# Altium PCB ESP8266_IR_PZEM.PcbDoc
Units mm, origin at the board's own origin, x right, y up, seen from the top; angles counter-clockwise.
Board outline 62.56 x 60.78 mm, 2 copper layers (Top Layer, Bottom Layer); 8 components, 10 nets, 54 pads, 1 vias.
Unrouted connection lines stored in the file: 4.
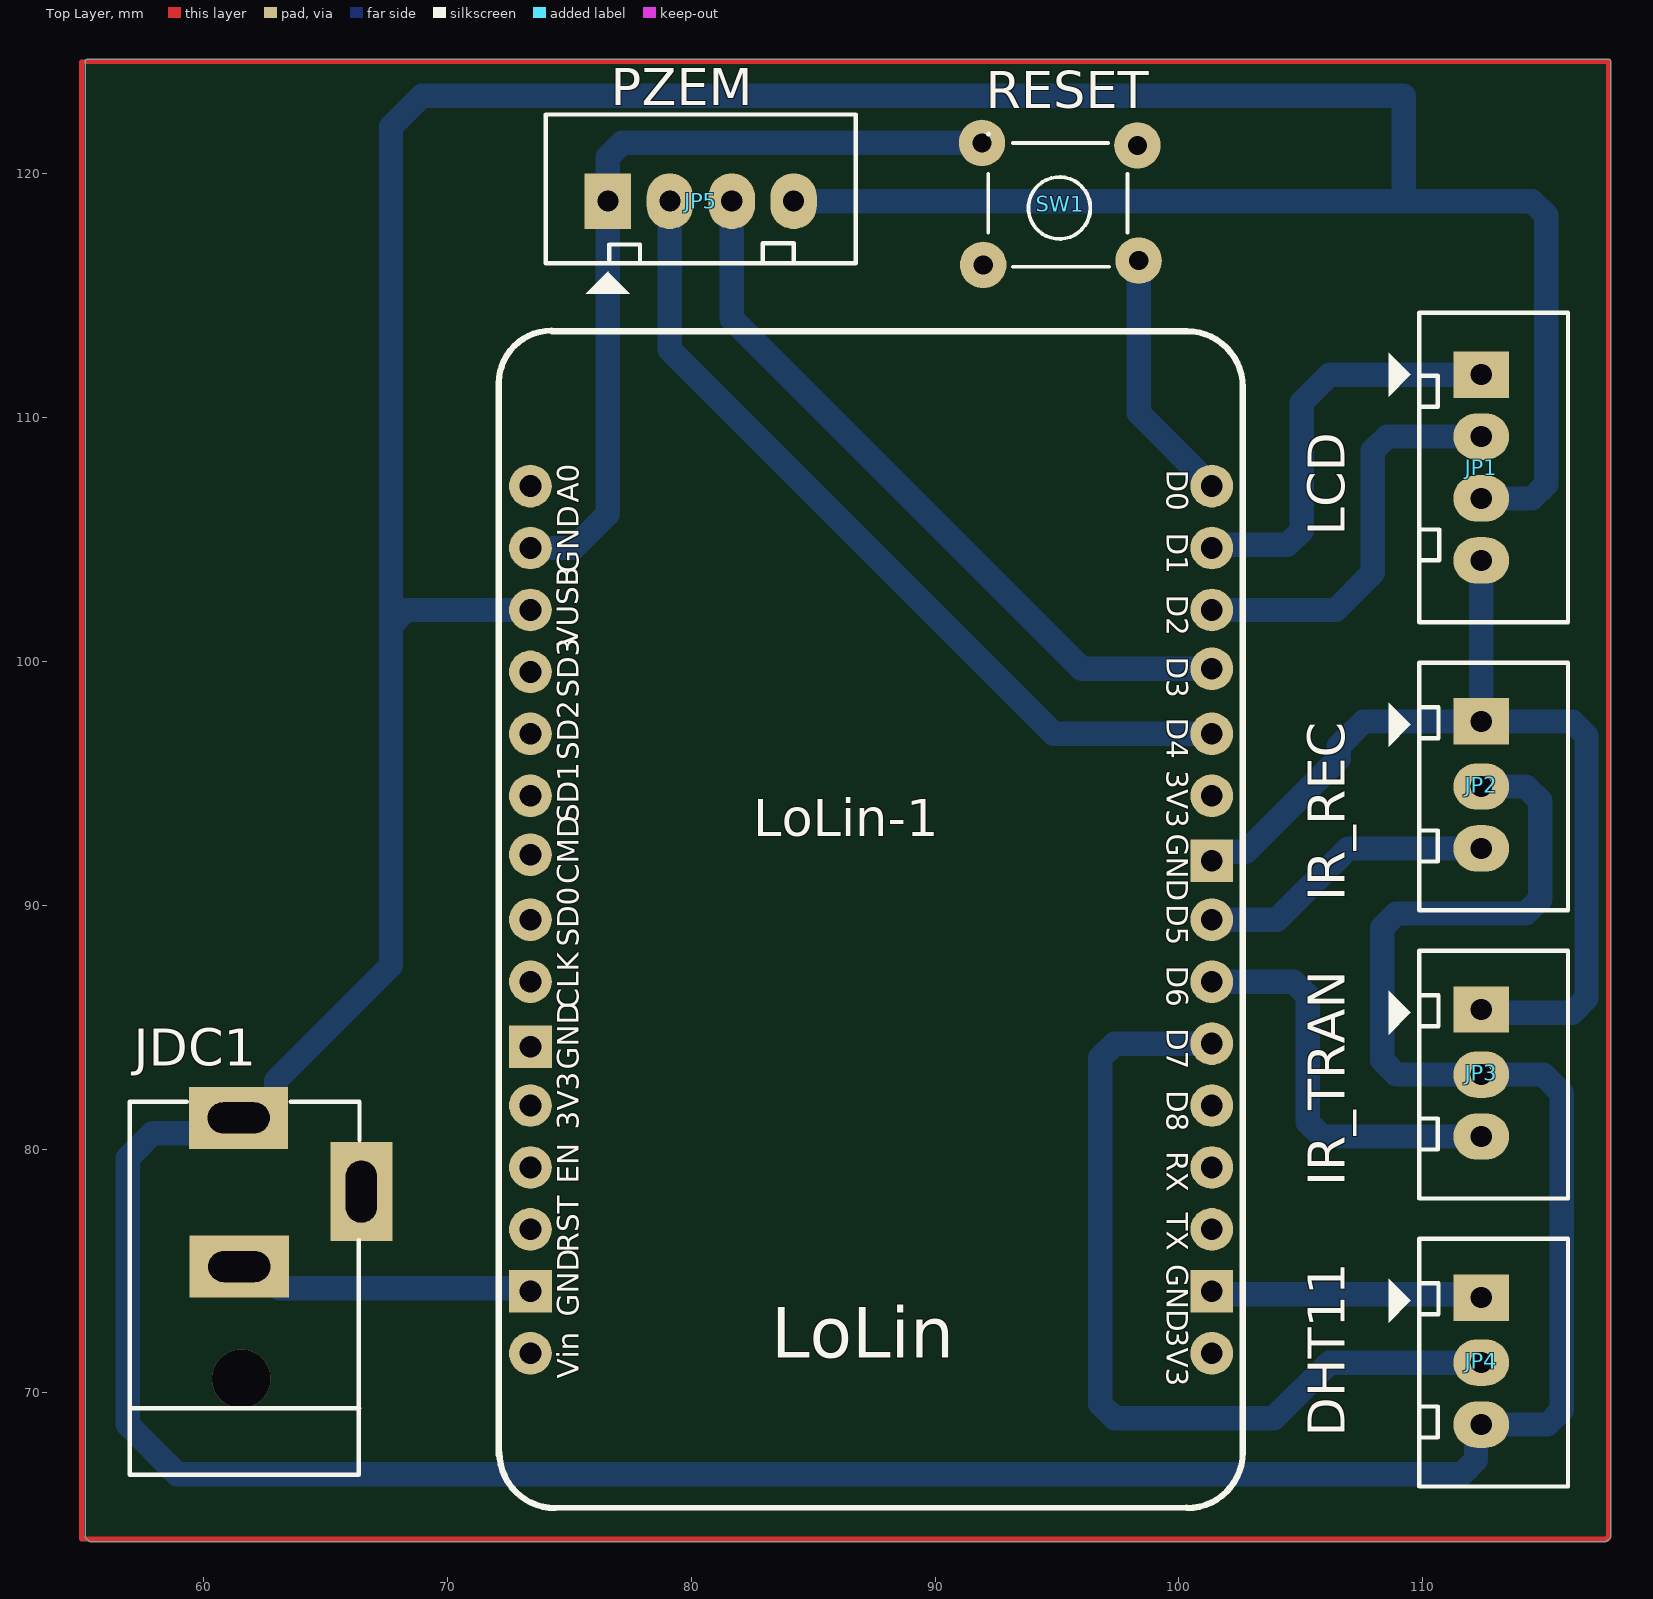
[diagram p0: Top Layer view]
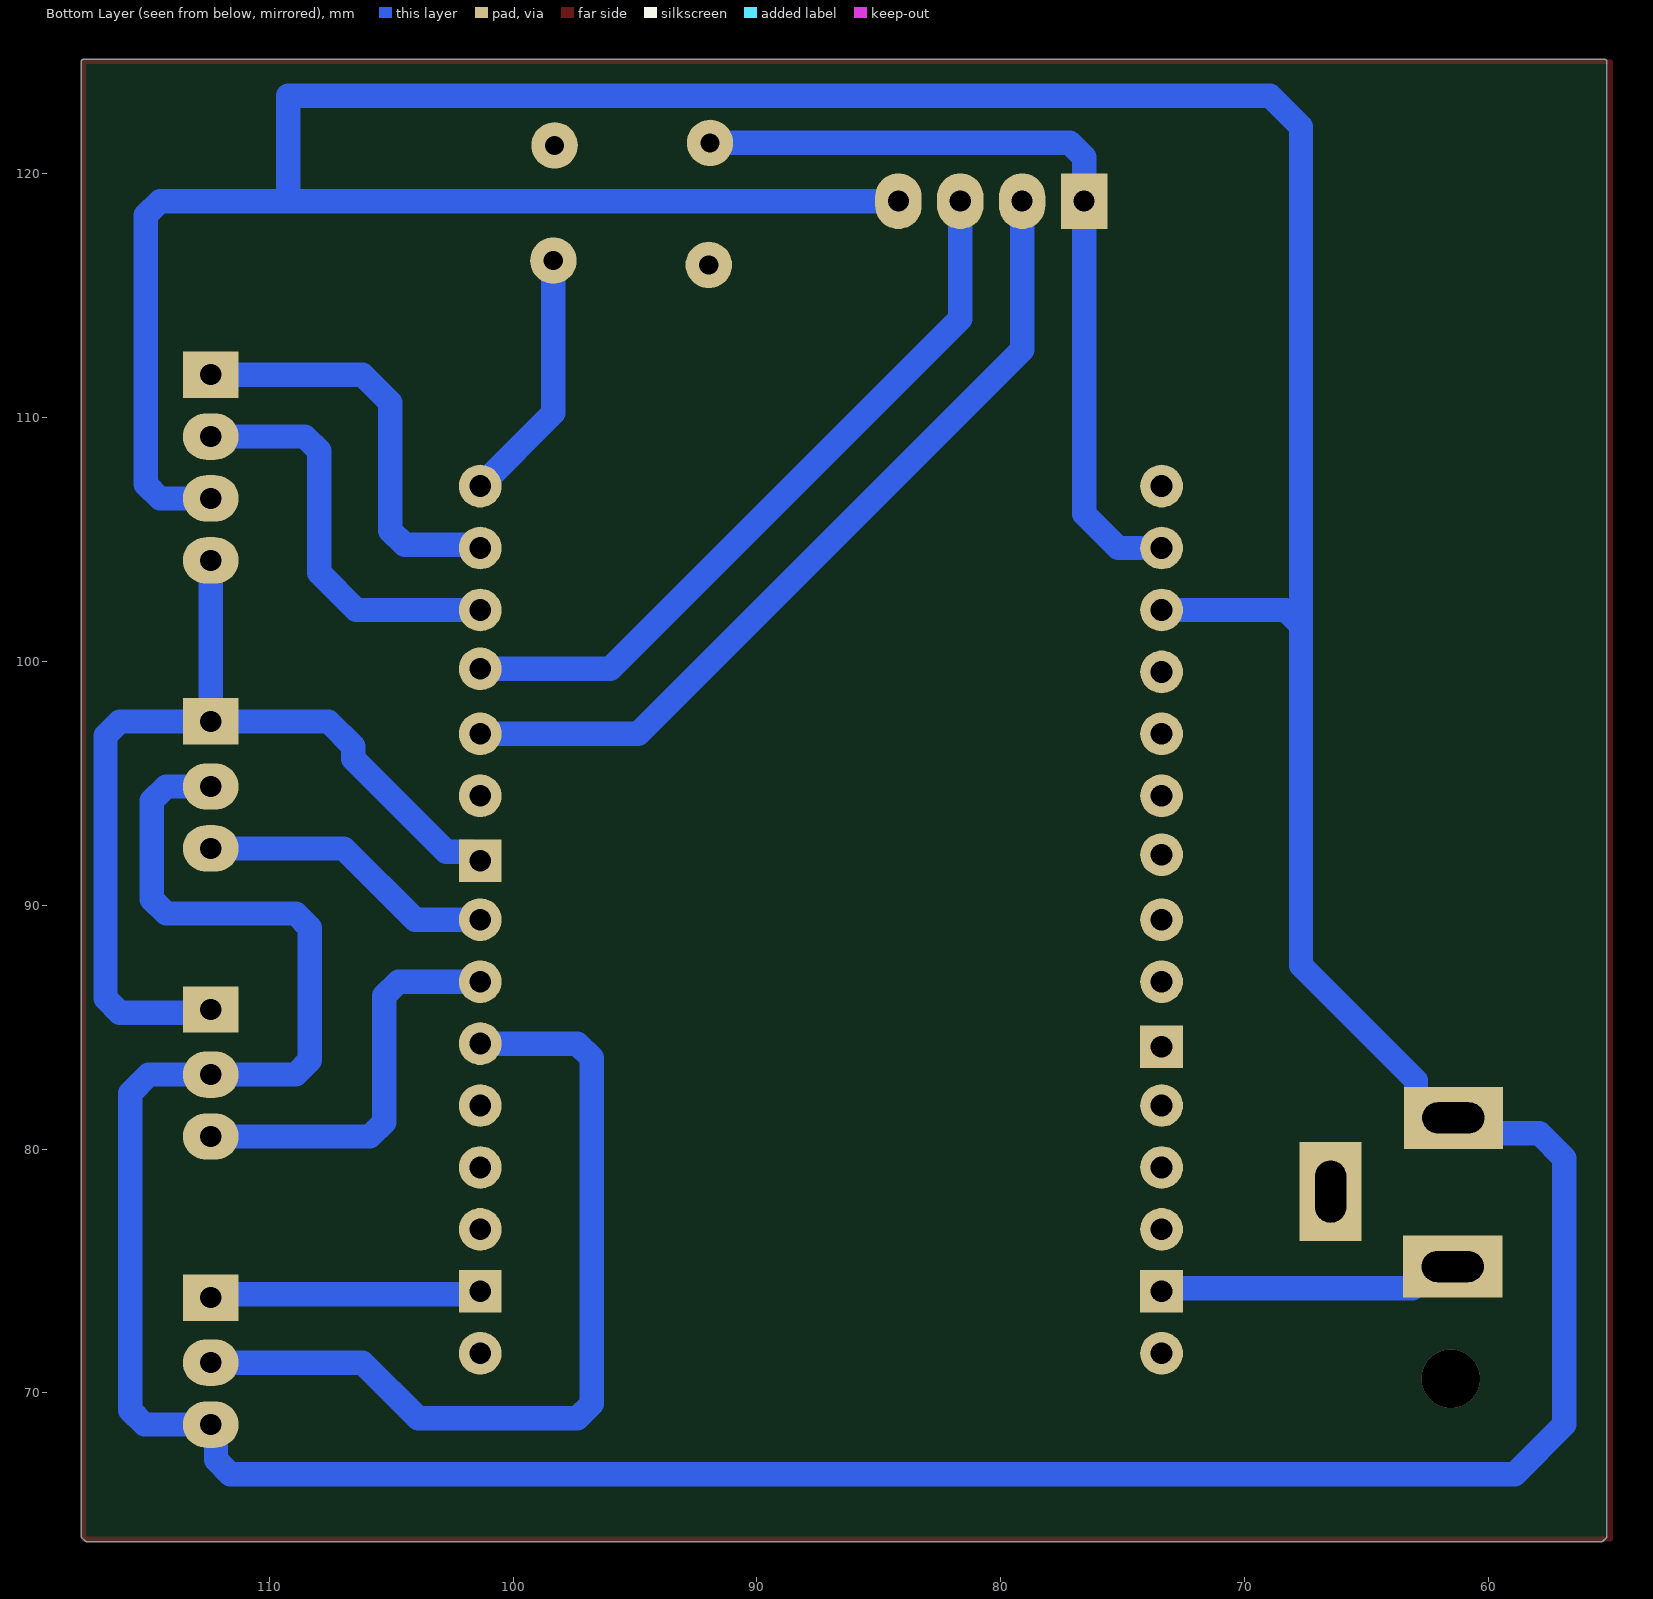
[diagram p1: Bottom Layer view, seen from below]
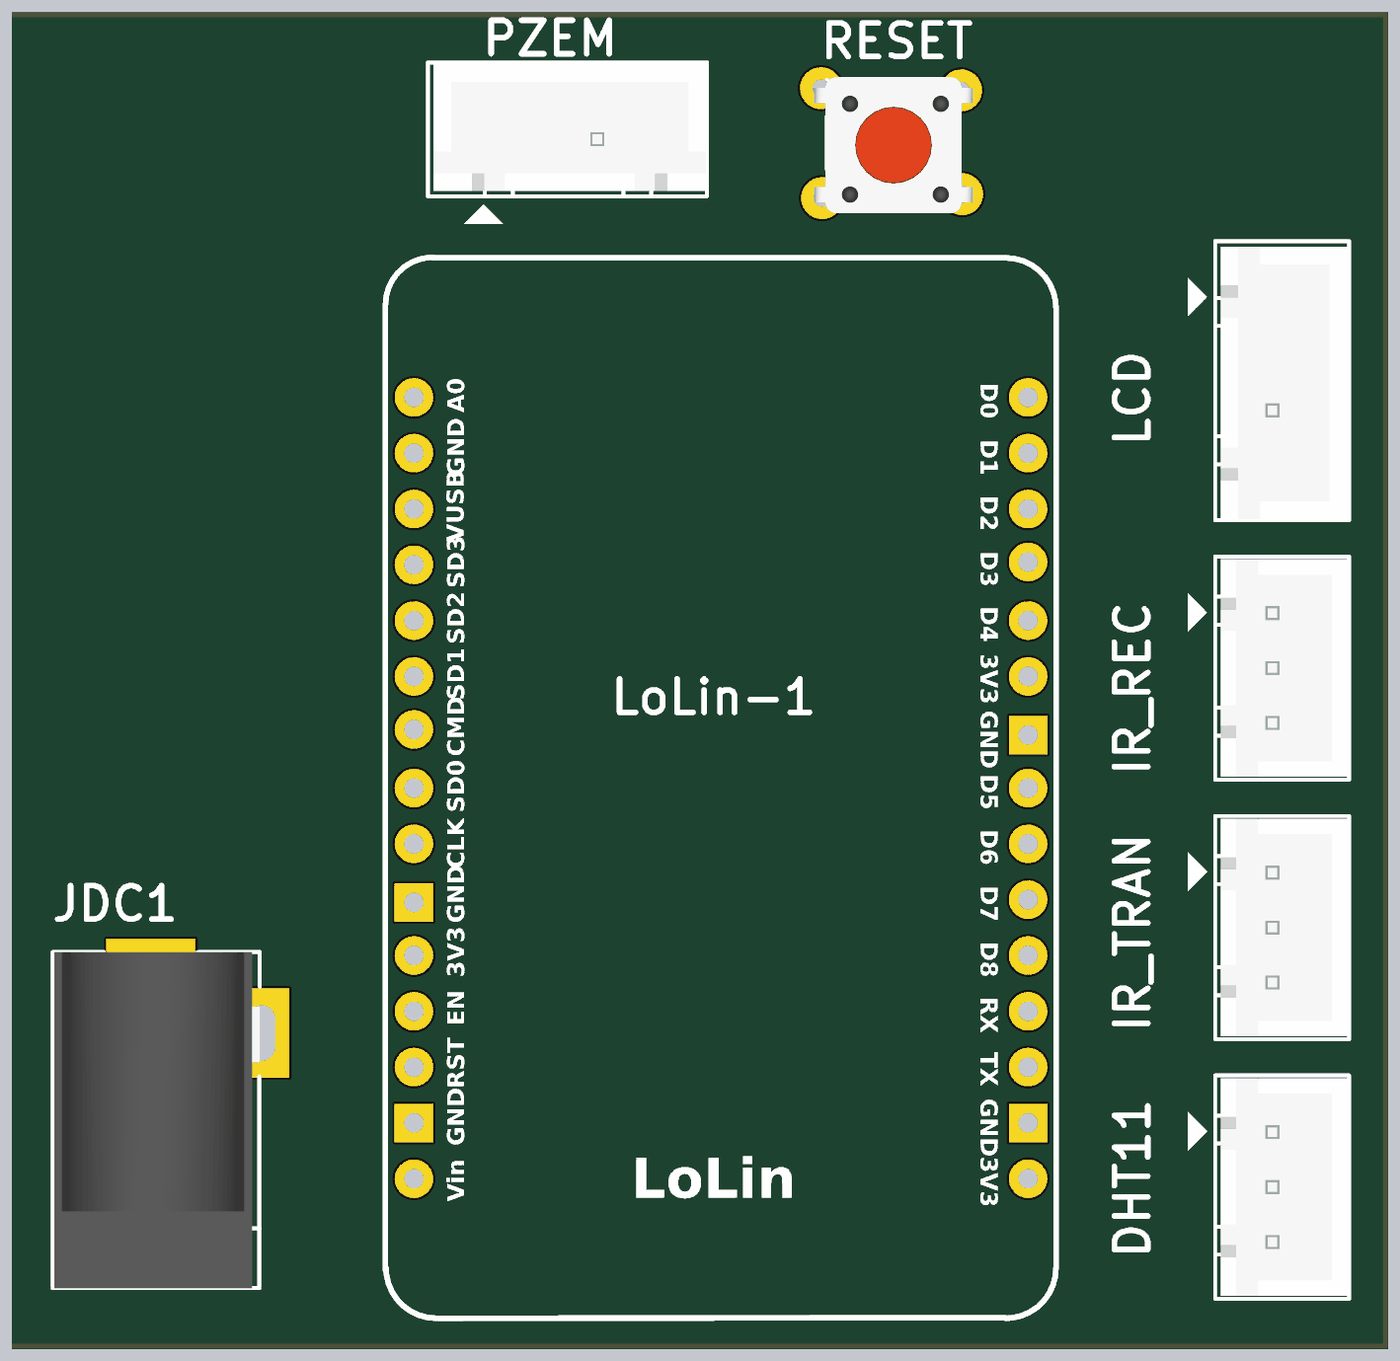
[diagram p2: 3D render of the assembled board from above, using the file's embedded part models]

## Layer stack, top to bottom
Top Solder: solder mask 0.0102, Solder Resist, Dk 3.5
Top Layer: signal copper 0.0356
Dielectric 1: dielectric 0.32, FR-4, Dk 4.8
Bottom Layer: signal copper 0.0356
Bottom Solder: solder mask 0.0102, Solder Resist, Dk 3.5

## Board outline
55.291,63.937 55.174,64.054 cw(c55.245,64.125) 55.145,64.125 55.145,124.587 cw(c55.245,124.587) 55.245,124.687 117.602,124.687 cw(c117.602,124.587) 117.702,124.587 117.702,117.162 cw(c117.602,117.162) 117.698,117.133 cw(c117.602,117.104) 117.702,117.104 117.702,64.125 cw(c117.602,64.125) 117.673,64.054 117.556,63.937 cw(c117.485,64.008) 117.485,63.908 55.362,63.908 cw(c55.362,64.008)

## Design rules (kind name [scope] priority, off if disabled: settings)
Clearance [All] p1: gap=0.254 ignorepadtopadclearanceinfootprint=FALSE except(0: Arc-Hole Track-Hole SMDPad-Hole THPad-Hole Via-Hole Fill-Hole Poly-Hole Region-Hole Text-Hole)
PolygonConnect [All] p1: connectstyle=Relief reliefconductorwidth=0.254 reliefentries=4 polygonreliefangle="90 Angle" airgapwidth=0.254
RoutingVias [All] p1: holewidth=0.711 width=1.27 viastyle="Through Hole" minholewidth=0.711 minwidth=1.27 maxholewidth=0.711 maxwidth=1.27
SolderMaskExpansion [All] p1: expansion=0.102 istentingtop=FALSE
Width [All] p1: maxlimit=2 minlimit=1 preferedwidth=1
30 further rules are at their usual default settings.

## Classes and differential pairs
component class ESP8266_IR_PZEM: JDC1 JP1 JP2 JP3 JP4 JP5 LoLin-1

## Components (designator, comment, footprint, x,y, rotation, side; value= is the part's Value field where it differs from the comment)
JDC1 "Jac DC" DC-IN 61.443,81.28 r90 top
JP1 "LCD" CON4 112.395,111.76 r270 top value="Connector 4"
JP2 "IR_REC" CON3 112.395,97.409 r270 top value="Connector 3"
JP3 "IR_TRAN" CON3 112.395,85.598 r270 top value="Connector 3"
JP4 "DHT11" CON3 112.395,73.787 r270 top value="Connector 3"
JP5 "PZEM" CON4 76.581,118.872 r0 top value="Connector 4"
LoLin-1 "NodeMCU V1.0 ESP-12E_1" "LoLin NodeMcu V3" 74.651,113.436 r0 top
SW1 "RESET" SW4 98.349,116.434 r180 top value="Button chip 4 pin"

## Footprints (in the part's own frame and the unit in brackets; to place one, negate y for a bottom-side part, rotate by r counter-clockwise, add the part's x,y. Pads: shape width x height; smd on the part's side, far side on the other; paste and mask are expansions set on the pad)
CON3 [mil] "CON 3"
  rect 75x90 hole 34: 1(-5,0)
  oval 75x90 hole 34: 2(100,0) 3(200,0)
  silkscreen extent -100,-150 300,140, body extent -95,-90 295,136, height 276
CON4 [mil] "CON4"
  rect 75x90 hole 34: 1(0,0)
  oval 75x90 hole 34: 2(100,0) 3(200,0) 4(300,0)
  silkscreen extent -100,-150 400,140, body extent -90,-90 398,136, height 276
DC-IN [mil] "Jac DC input"
  rect 100x160 hole 50 slot 100 at 90 deg: 1(0,0) 2(-240,-1)
  rect 160x100 hole 50 slot 100 at 0 deg: 3(-119,-198)
  silkscreen extent -576,-195 26,176, body extent -576,-195 26,173, height 434
"LoLin NodeMcu V3" [mil]
  round 69 hole 35: 3V3(-49,-1246) 3V3(1051,-1646) 3V3(1051,-746) A0(-49,-246) CLK(-49,-1046) CMD(-49,-841) D0(1051,-246) D1(1051,-346) D2(1051,-446) D3(1051,-541) D4(1051,-646) D5(1051,-946) D6(1051,-1046) D7(1051,-1146) D8(1051,-1246) EN(-49,-1346) GND(-49,-346) RST(-49,-1446) RX(1051,-1346) SD0(-49,-946) SD1(-49,-746) SD2(-49,-646) SD3(-49,-546) TX(1051,-1446) VIN(-49,-1646) VUSB(-49,-446)
  rect 69x69 hole 35: GND(-49,-1546) GND(-49,-1151) GND(1051,-1546) GND(1051,-851)
  silkscreen extent -100,-1896 1101,5
SW4 [mil] "SW button 4pin, 250 x250 mil"
  round 75 hole 31: 1(0,0) 2(253,-190) 3(251,7) 4(2,-186)
  silkscreen extent 18,-205 243,10, body extent -33,-210 279,34, height 276

## Part data
JDC1: library part DCIN, "Jac DC input"
JP1 JP5: library part Con4, "Connector 4"
JP2 JP3 JP4: library part Con3, "Connector 3"
LoLin-1: "LoLin NodeMCU V3"
SW1: library part SW4, "Switch button 4 pin"

## Via types
v1: diameter 2.4, hole 2.4, Top Layer to Bottom Layer, 1 vias

## Nets (pads, with @x,y where several pads share a name; then routed paths per layer and width w, separated by ;. In a path a pad name is that pad's centre, name@x,y a point inside that pad or via, vN(x,y) a via of type N, cw(c..) or ccw(c..) an arc to the next point about the centre after c; other vN are vias at no path point)
DHT_DATA: JP4.2 LoLin-1.D7 | length 36
  Bottom Layer w1: LoLin-1.D7@101.49,84.184 LoLin-1.D7 97.36,84.328 96.774,83.742 96.774,69.547 97.36,68.961 103.886,68.961 106.172,71.247 JP4.2
GND: JDC1.2 JP1.4 JP2.1 JP3.1 JP4.1 JP5.1 LoLin-1.GND SW1.2 | length 98.3
  Bottom Layer w1: JDC1.2 62.23,75.184 63.119,74.295 73.279,74.295 LoLin-1.GND@73.406,74.168 ; LoLin-1.GND@73.202,104.648 73.406,104.648 75.184,104.648 76.581,106.045 JP5.1 76.581,120.674 77.167,121.26 SW1.2 ; LoLin-1.GND@101.346,74.168 101.473,74.041 112.268,74.041 JP4.1 JP4.1@112.658,74.177 ; LoLin-1.GND@101.346,91.821 101.722,92.197 102.738,92.197 106.553,96.012 106.553,96.52 107.569,97.536 JP2.1 ; JP3.1 112.522,85.598 116.127,85.598 116.713,86.184 116.713,96.95 116.127,97.536 JP2.1 ; JP1.4 JP2.1
IR_REC_DATA: JP2.3 LoLin-1.D5 | length 12.3
  Bottom Layer w1: LoLin-1.D5 104.013,89.408 106.934,92.329 JP2.3
IR_TRAN_DATA: JP3.3 LoLin-1.D6 | length 16.7
  Bottom Layer w1: LoLin-1.D6 104.697,86.868 105.283,86.282 105.283,81.104 105.869,80.518 JP3.3
PZEM_RX: JP5.3 LoLin-1.D3 | length 30.5
  Bottom Layer w1: JP5.3 81.661,114.046 96.012,99.695 LoLin-1.D3
PZEM_TX: JP5.2 LoLin-1.D4 | length 34.8
  Bottom Layer w1: JP5.2 79.121,112.776 94.869,97.028 LoLin-1.D4
RESET_BTN: LoLin-1.D0 SW1.1 | length 10.5
  Bottom Layer w1: SW1.1 98.349,110.185 LoLin-1.D0
SCL: JP1.1 LoLin-1.D1 | length 17.1
  Bottom Layer w1: LoLin-1.D1 101.473,104.775 104.443,104.775 105.029,105.361 105.029,110.617 106.172,111.76 JP1.1
SDA: JP1.2 LoLin-1.D2 | length 16.9
  Bottom Layer w1: LoLin-1.D2 106.426,102.108 107.95,103.632 107.95,108.634 108.536,109.22 JP1.2
VCC: JDC1.1 JP1.3 JP2.2 JP3.2 JP4.3 JP5.4 LoLin-1.VUSB | length 258.7
  Bottom Layer w1: LoLin-1.VUSB 68.326,102.108 67.691,101.473 ; JP5.4 109.22,118.872 ; JP2.2 114.222,94.869 114.808,94.283 114.808,90.248 114.222,89.662 108.917,89.662 108.331,89.076 108.331,83.644 108.917,83.058 JP3.2 114.935,83.058 115.697,82.296 115.697,69.293 115.111,68.707 JP4.3 112.182,68.494 112.182,67.261 111.597,66.675 58.928,66.675 56.896,68.707 56.896,79.629 57.911,80.644 60.806,80.644 JDC1.1 62.205,81.28 62.975,82.05 62.975,82.812 67.691,87.528 67.691,101.473 ; JP1.3 114.476,106.68 115.062,107.266 115.062,118.286 114.476,118.872 109.22,118.872 ; 67.691,101.473 67.691,121.92 68.961,123.19 109.22,123.19 109.22,118.872
pads on no net: JDC1.3 LoLin-1.3V3 LoLin-1.A0 LoLin-1.CLK LoLin-1.CMD LoLin-1.D8 LoLin-1.EN LoLin-1.RST LoLin-1.RX LoLin-1.SD0 LoLin-1.SD1 LoLin-1.SD2 LoLin-1.SD3 LoLin-1.TX LoLin-1.VIN SW1.3 SW1.4
copper on no net: | length 246.5
  Top Layer w0.2: 117.485,64.008 117.602,64.125 ; 54.991,64.008 54.991,124.587 55.118,124.587 117.602,124.587 117.602,64.008 54.991,64.008
  other v1: 61.544,70.587

## Text inside footprints (layer, text, board x,y; h text height)
LoLin-1: Top Overlay "GND" at 75.692,83.261 h1.52 r90; Top Overlay "3V3" at 75.692,80.797 h1.52 r90; Top Overlay "EN" at 75.692,78.588 h1.52 r90; Top Overlay "RST" at 75.692,75.743 h1.52 r90; Top Overlay "GND" at 75.692,73.127 h1.52 r90; Top Overlay "Vin" at 75.692,70.587 h1.52 r90; Top Overlay "D7" at 99.187,84.957 h1.52 r270; Top Overlay "D8" at 99.187,82.42 h1.52 r270; Top Overlay "RX" at 99.187,79.907 h1.52 r270; Top Overlay "TX" at 99.187,77.394 h1.52 r270; Top Overlay "GND" at 99.187,75.28 h1.52 r270; Top Overlay "3V3" at 99.187,72.644 h1.52 r270; Top Overlay "D6" at 99.187,87.525 h1.52 r270; Top Overlay "CMD" at 75.692,90.852 h1.52 r90; Top Overlay "D0" at 99.187,107.848 h1.52 r270; Top Overlay "D1" at 99.187,105.274 h1.52 r270; Top Overlay "D2" at 99.187,102.728 h1.52 r270; Top Overlay "D3" at 99.187,100.188 h1.52 r270; Top Overlay "D4" at 99.187,97.688 h1.52 r270; Top Overlay "3V3" at 99.187,95.529 h1.52 r270; Top Overlay "GND" at 99.187,92.939 h1.52 r270; Top Overlay "D5" at 99.187,90.043 h1.52 r270; Top Overlay "A0" at 75.692,106.502 h1.52 r90; Top Overlay "GND" at 75.692,103.607 h1.52 r90; Top Overlay "VUSB" at 75.667,100.609 h1.52 r90; Top Overlay "SD3" at 75.692,98.505 h1.52 r90; Top Overlay "SD2" at 75.692,95.954 h1.52 r90; Top Overlay "SD1" at 75.692,93.403 h1.52 r90; Top Overlay "SD0" at 75.692,88.301 h1.52 r90; Top Overlay "CLK" at 75.692,85.75 h1.52 r90; Top Overlay "LoLin" at 83.287,70.764 h3.56